# Altium PCB IMA2192_0.9B.PcbDoc
Units mm, origin at the board's own origin, x right, y up, seen from the top; angles counter-clockwise.
Board outline 38.2 x 38.2 mm, 4 copper layers (Top, INT1, GND, Bottom), stack 0.965 mm thick; 63 components, 50 nets, 206 pads, 94 vias.
Unrouted connection lines stored in the file: 29.
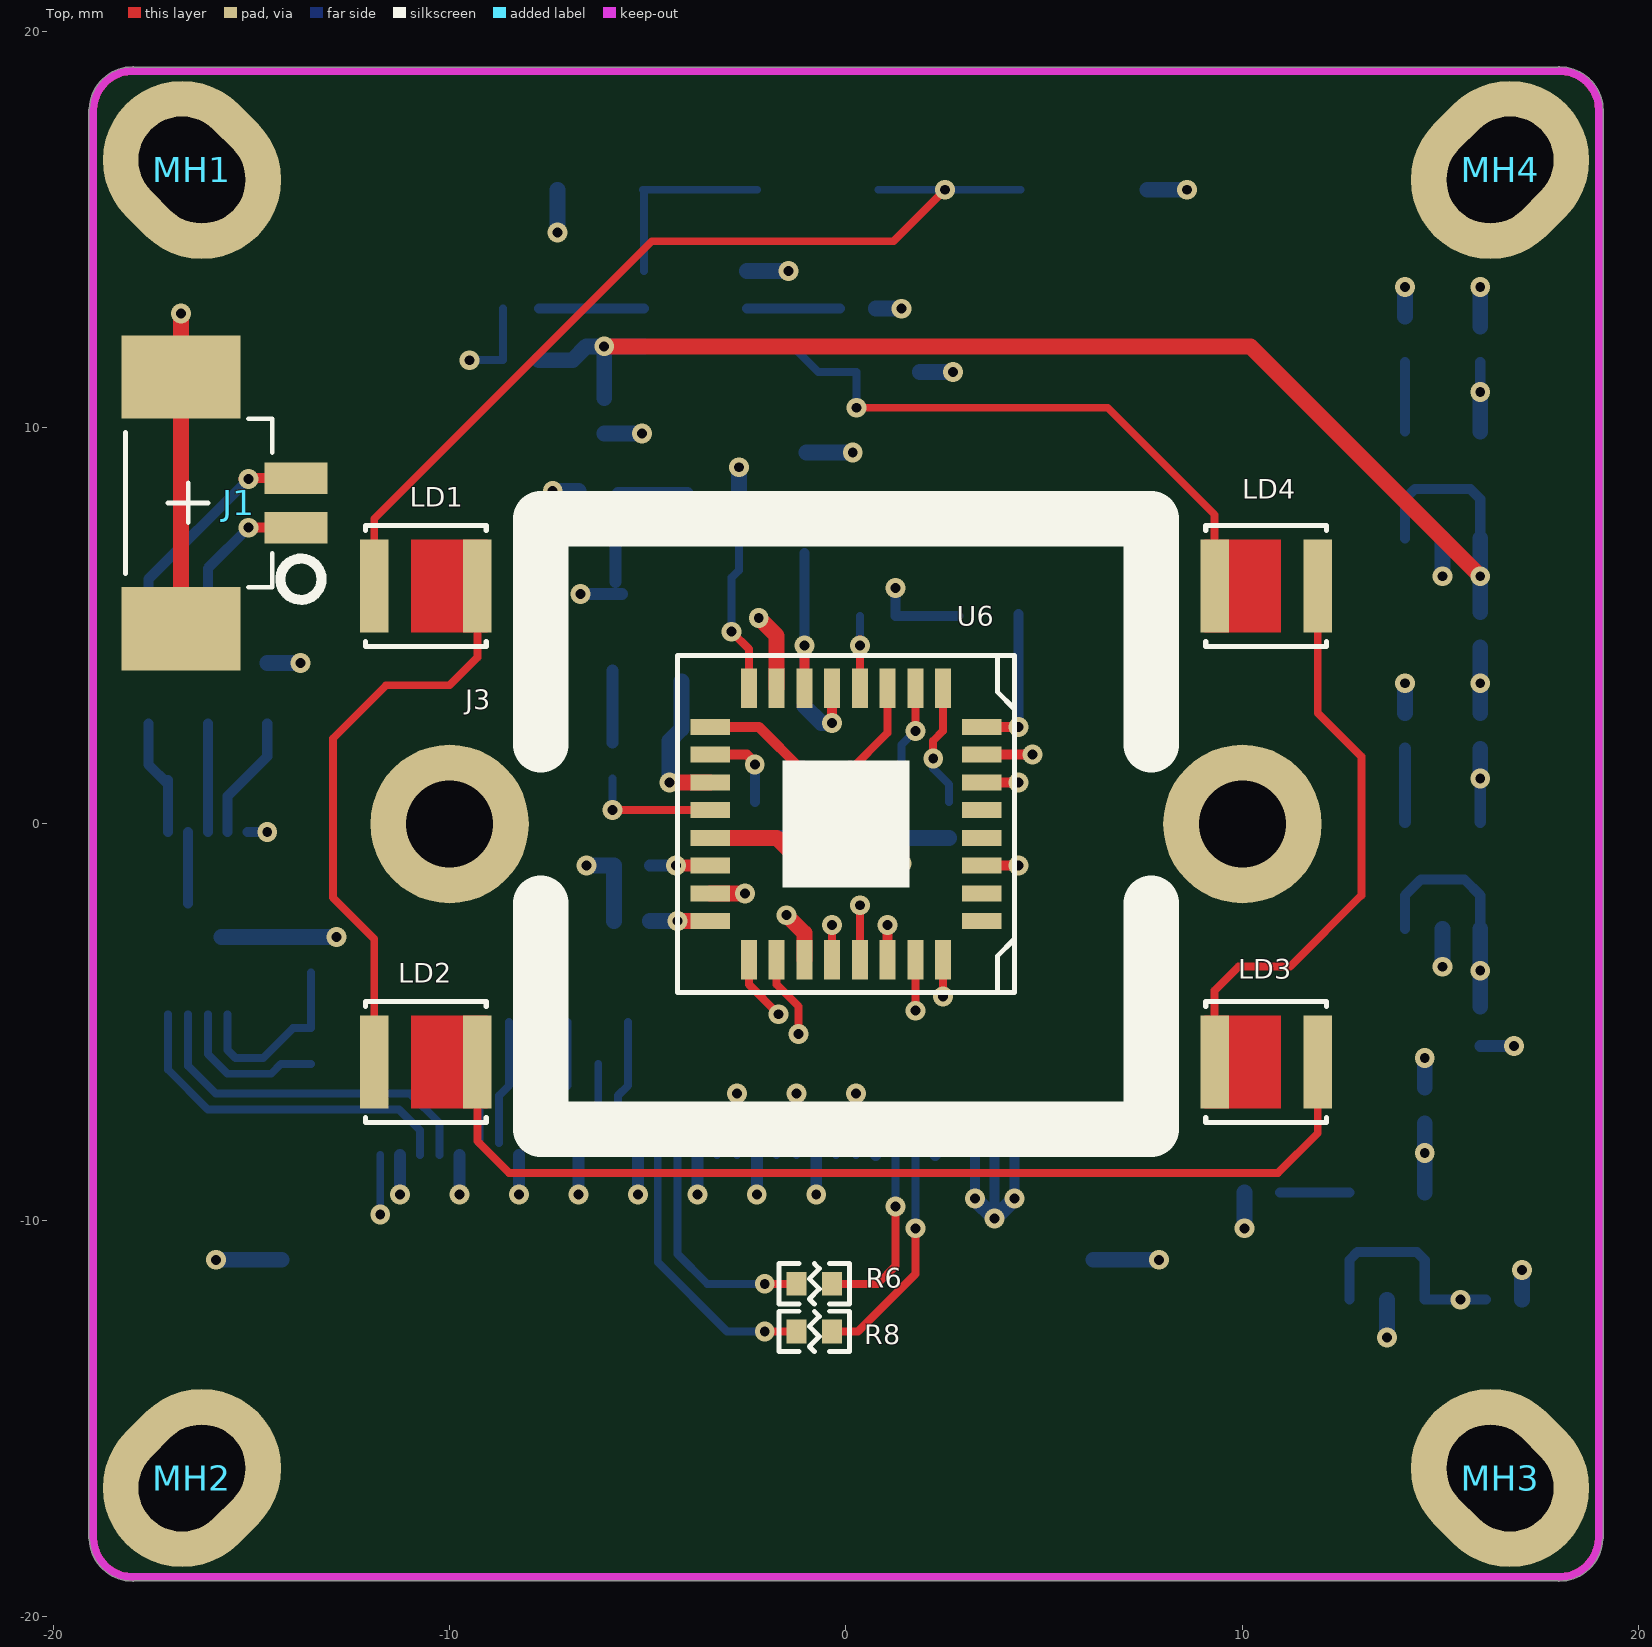
[diagram p0: Top view]
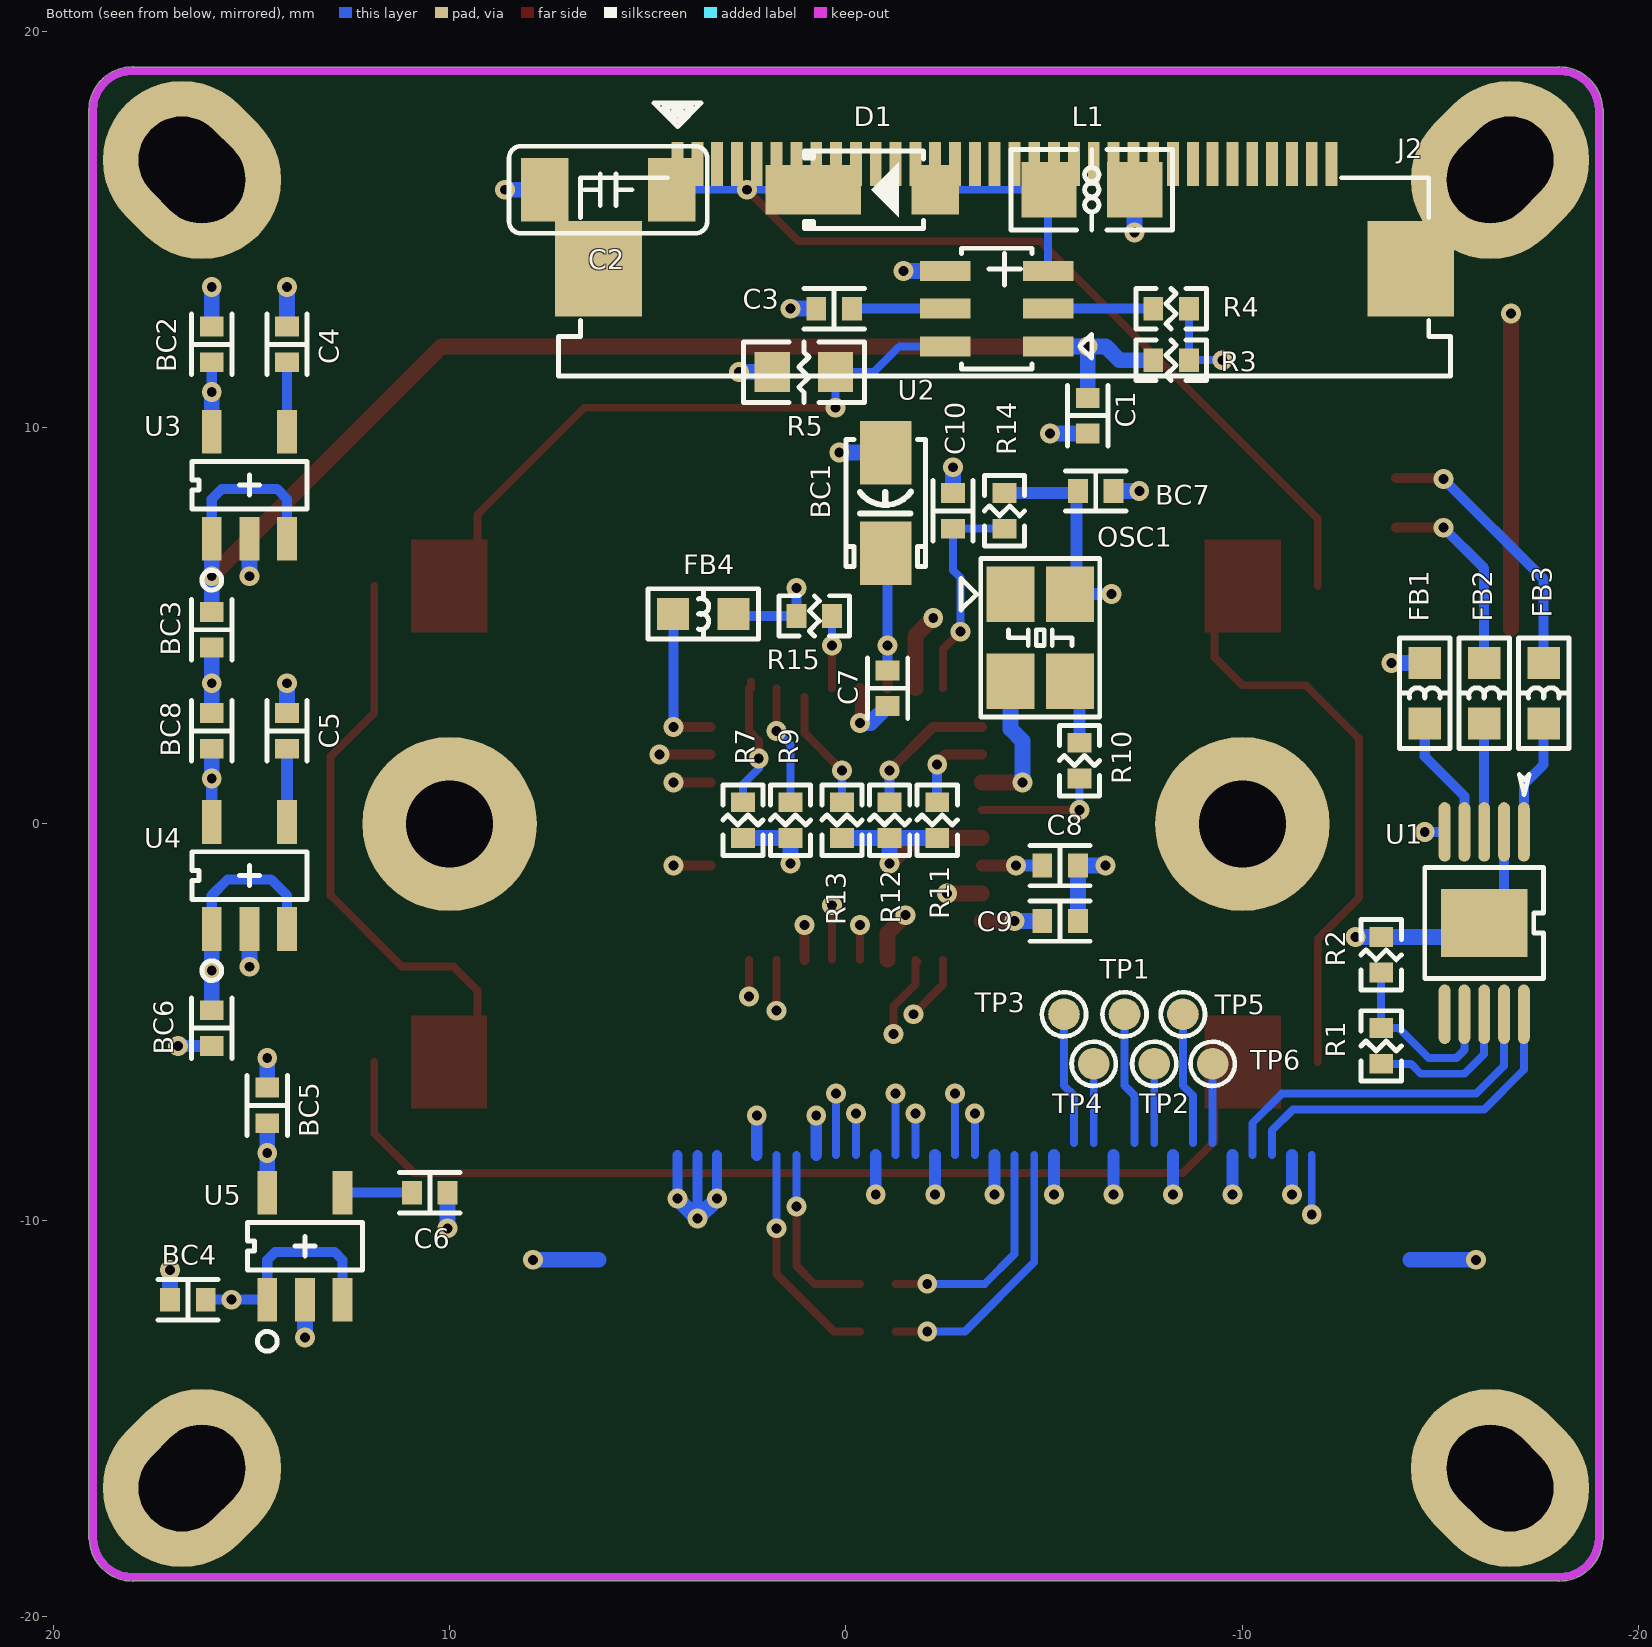
[diagram p1: Bottom view, seen from below]
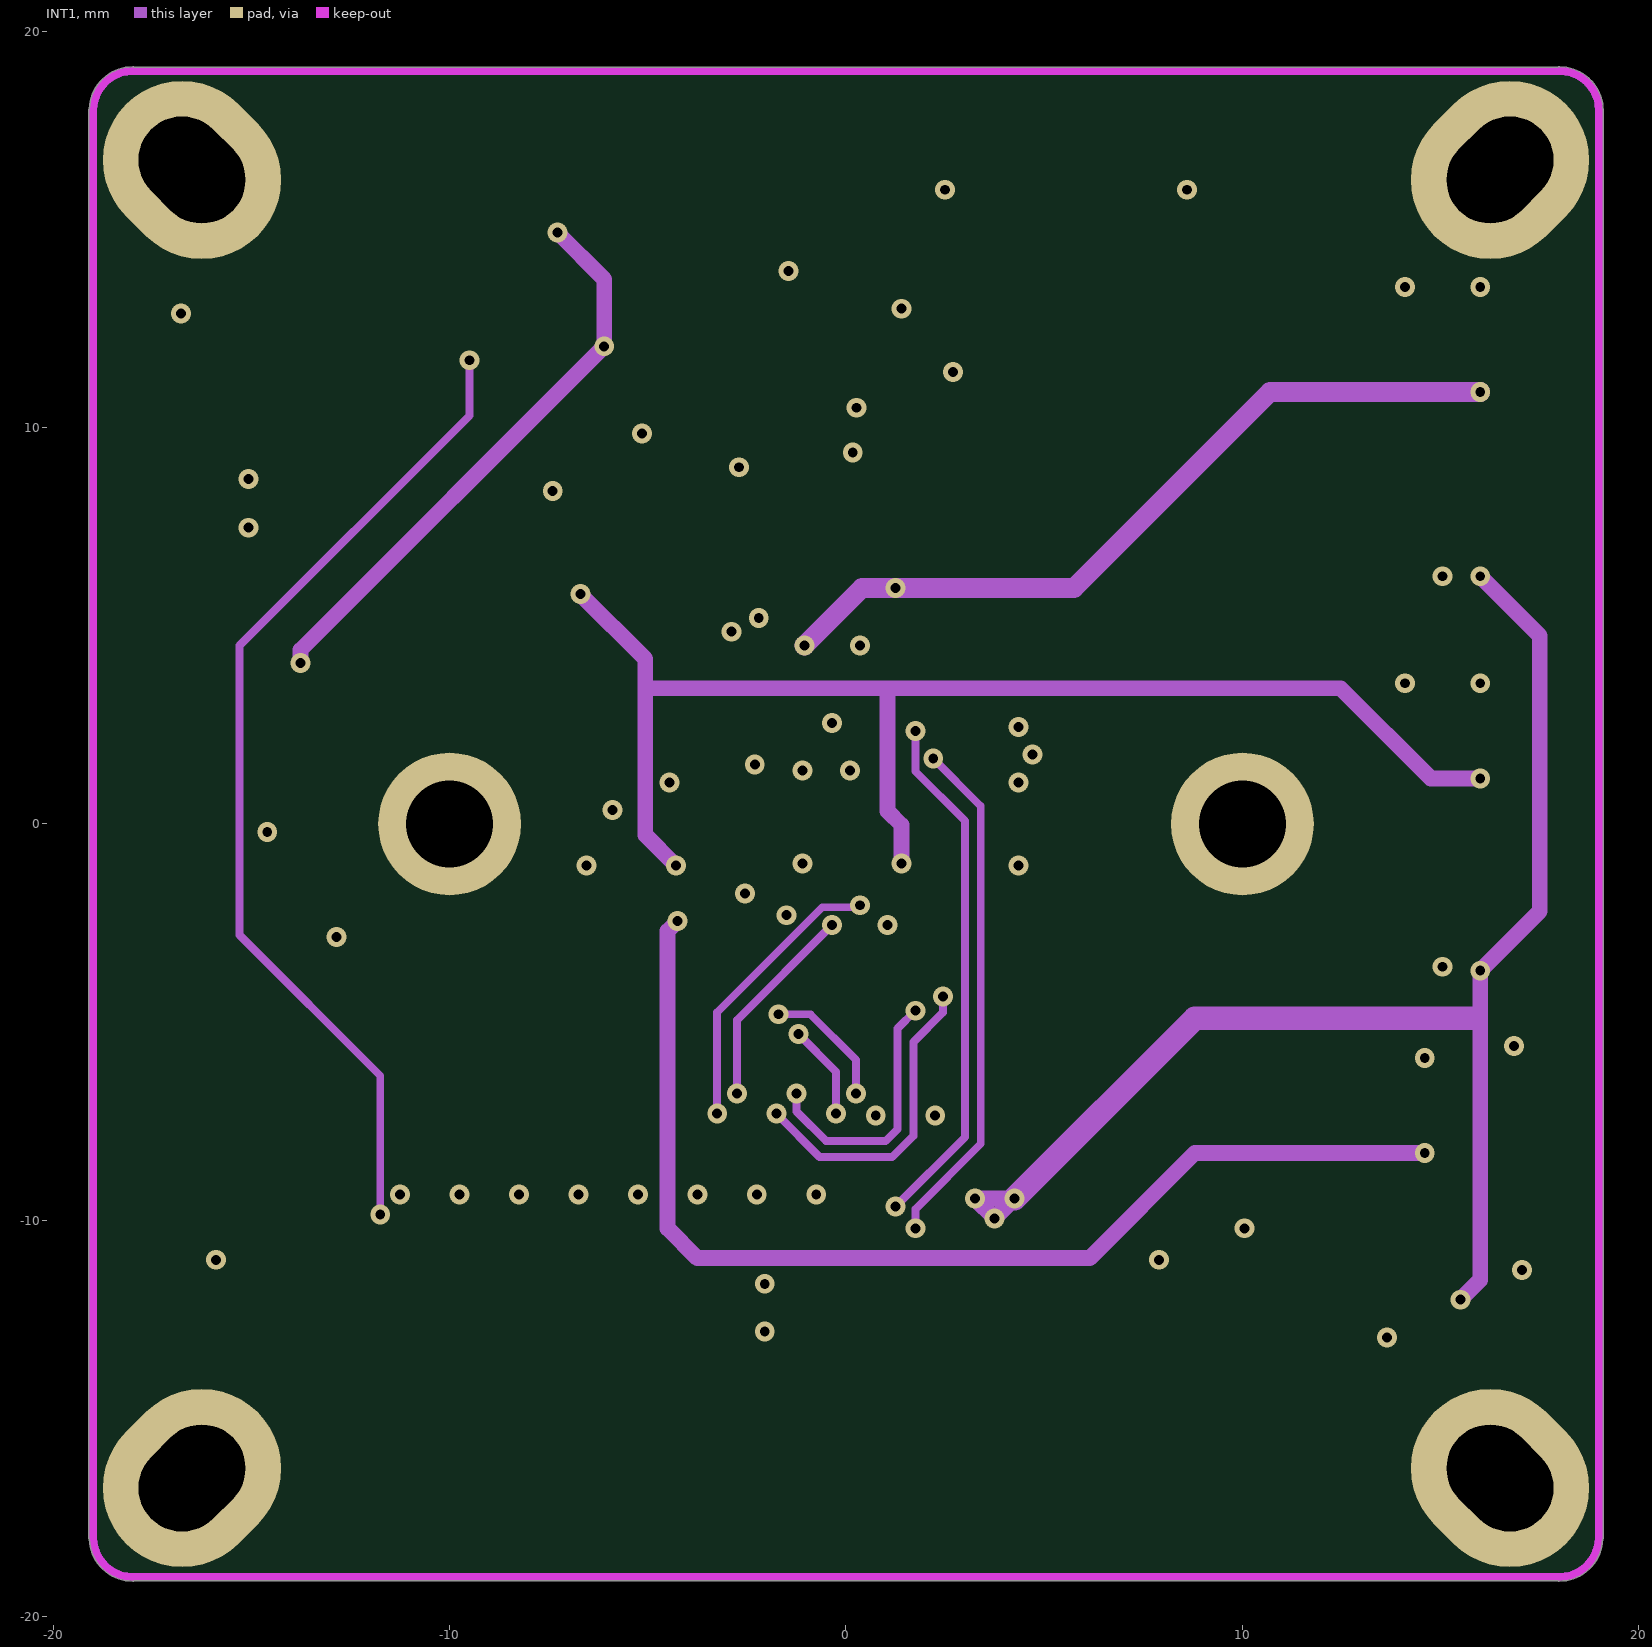
[diagram p2: INT1]
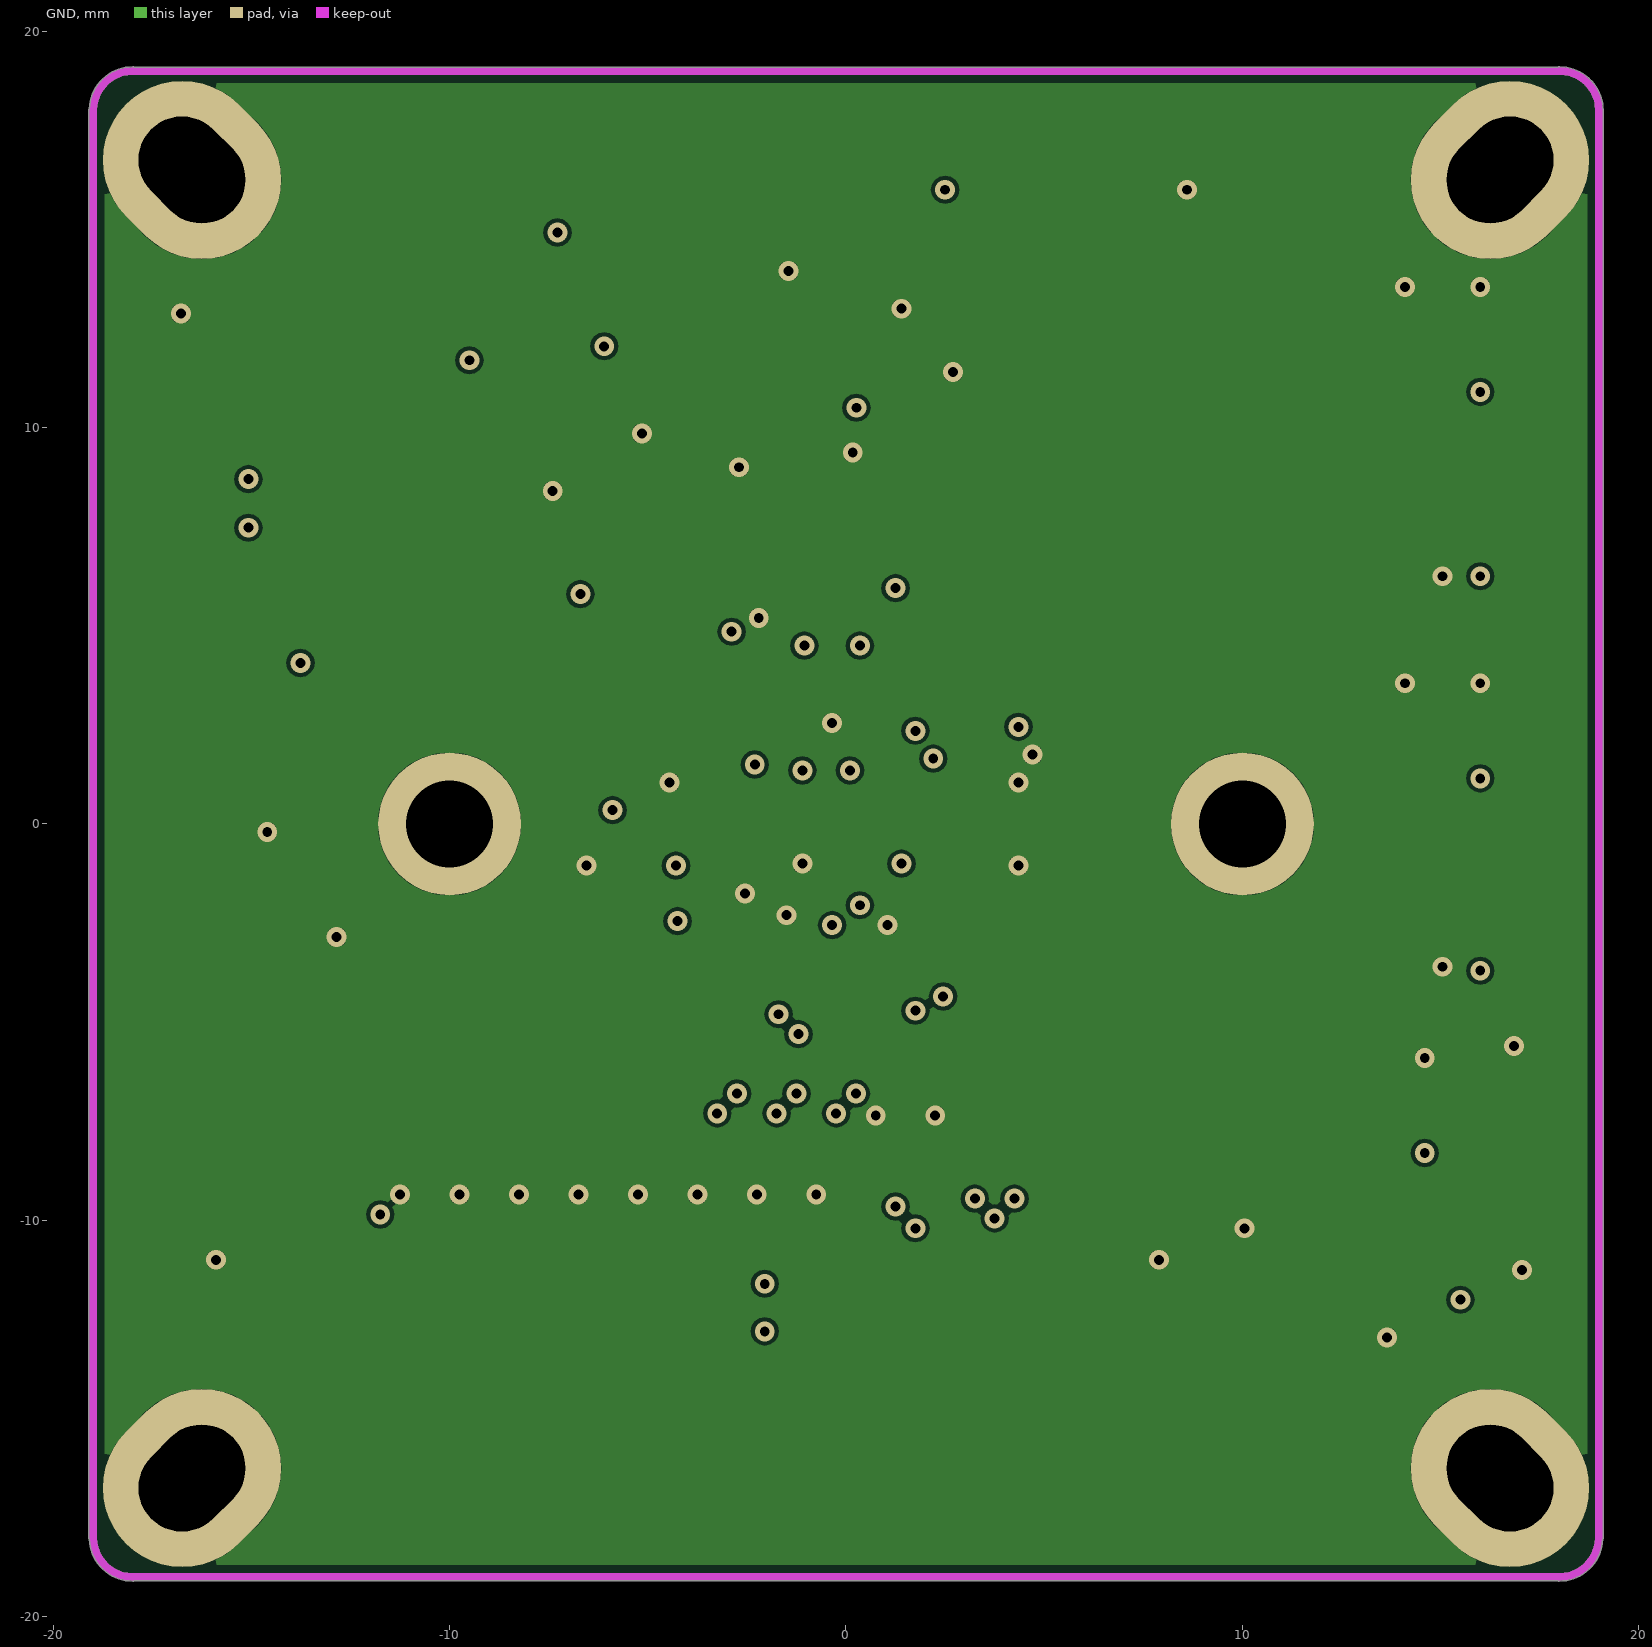
[diagram p3: GND]

## Layer stack, top to bottom
Solder Mask Top: solder mask 0.0102, Solder Resist, Dk 3.5
Top: signal copper 0.0343
Dielectric 1: dielectric 0.254, FR-4, Dk 4.3
INT1: signal copper 0.0343
Dielectric2: dielectric 0.254, FR-4, Dk 4.3
GND: signal copper 0.0343
Dielectric4: dielectric 0.32, FR-4, Dk 4.8
Bottom: signal copper 0.0343
Solder Mask Bottom: solder mask 0.0102, Solder Resist, Dk 3.5

## Board outline
-19.091,-18.043 cw(c-19,-18) -19.1,-18 -19.1,18 cw(c-19,18) -19.091,18.043 cw(c-17.991,18) -17.991,19.1 cw(c-17.991,19) -17.951,19.092 17.959,19.092 cw(c18,19) 18,19.1 cw(c18,18) 19.1,18 19.1,-18 cw(c19,-18) 19.091,-18.043 cw(c17.991,-18) 17.991,-19.1 cw(c17.991,-19) 17.951,-19.092 -17.951,-19.092 cw(c-17.991,-19) -17.991,-19.1 cw(c-17.991,-18)

## Design rules (kind name [scope] priority, off if disabled: settings)
AssemblyTestPointUsage [All] p1 off:
AssemblyTestpoint [All] p1 off: testpointundercomponent=TRUE minsize=1.016 maxsize=2.54 preferedsize=1.524 minholesize=0 maxholesize=1.016 preferedholesize=0.813 testpointgrid=0.025 usegrid=TRUE gridtolerance=0 allowsidetop=TRUE allowsidebottom=TRUE
Clearance Clearance_6 [InNet('+12V') or InNet('N21617464') or InNet('+5.0V')  or InNet('+3.3V') vs IsFill] p1: gap=0.4
Clearance Clearance_4 [InComponent('MH1') OR InComponent('MH2') OR InComponent('MH3') OR InComponent('MH4') or INnet('GND') vs OnLayer('Keep-Out Layer')] p2: gap=0
Clearance Clearance_3 [InComponent('U4') or InComponent('RP1') or InComponent('RP2')] p3: gap=0.127
Clearance Clearance_2 [OnLayer('Keep-Out Layer') vs InNet('GND')] p4: gap=0.1
Clearance Clearance_1 [IsVia] p5: gap=0.1
Clearance [All] p6: gap=0.2
ComponentClearance ComponentClearance_1 [InComponent('J3') vs InComponent('U6') or InComponent('LD1') or InComponent('LD2') or InComponent('LD3') or InComponent('LD4')] p1: gap=-10 collisioncheckmode=3 verticalgap=0.254 showdistances=FALSE
ComponentClearance [All] p2: gap=0.01 collisioncheckmode=3 verticalgap=0 showdistances=FALSE
DiffPairsRouting [All] p1 off: maxlimit=0.254 minlimit=0.2 mostfreqgap=0.254 toplayer_prefgap=0.2 toplayer_minwidth=0.2 toplayer_maxwidth=0.381 toplayer_prefwidth=0.254 midlayer1_mingap=0.254 midlayer1_minwidth=0.381 midlayer1_maxwidth=0.381 midlayer1_prefwidth=0.381 midlayer2_mingap=0.254 midlayer2_minwidth=0.381 midlayer2_maxwidth=0.381 midlayer2_prefwidth=0.381 bottomlayer_prefgap=0.2 bottomlayer_minwidth=0.2 bottomlayer_maxwidth=0.381 bottomlayer_prefwidth=0.254 maxuncoupledlength=12.7
FabricationTestPointUsage [All] p1 off: valid=0 allowmultiple=FALSE
FabricationTestpoint [All] p1 off: side=3 testpointundercomponent=TRUE minsize=1.016 maxsize=2.54 preferedsize=1.524 minholesize=0 maxholesize=1.016 preferedholesize=0.813 testpointgrid=0.025 allowsidetop=TRUE allowsidebottom=TRUE usegrid=TRUE gridtolerance=0
FanoutControl Fanout_BGA [IsBGA] p1 off: bgadir=Out bgaviamode=Centered fanoutstyle=Auto fanoutdirection=Alternating viagrid=0.025 // Fanout_BGA (Default Rule)
FanoutControl Fanout_SOIC [IsSOIC] p3 off: bgadir=Out bgaviamode=Centered fanoutstyle=Auto fanoutdirection=Alternating viagrid=0.025 // Fanout_SOIC (Default Rule)
FanoutControl Fanout_Small [(CompPinCount < 5)] p4 off: bgadir=Out bgaviamode=Centered fanoutstyle=Auto fanoutdirection=OutThenIn viagrid=0.025 // Fanout_Small (Default Rule)
FanoutControl Fanout_Default [All] p5 off: bgadir=Out bgaviamode=Centered fanoutstyle=Auto fanoutdirection=Alternating viagrid=0.025 // Fanout_Default (Default Rule)
Height [All] p1 off: minheight=0 maxheight=25.4 prefheight=12.7
HoleSize [All] p1: absolutevalues=TRUE maxlimit=5 minlimit=0.25 maxpercent=80.000 minpercent=20.000
HoleToHoleClearance [All] p1: gap=0.2 allowstackedmicrovias=TRUE
MinimumSolderMaskSliver [All] p1: minsoldermaskwidth=0
PasteMaskExpansion [All] p1 off: expansion=0
PermittedLayers [All] p1 off: toplayerpermitted=TRUE bottomlayerpermitted=TRUE
PlaneClearance [InNet('GND')] p1 off: clearance=0.508
PlaneConnect [All] p1 off: planeconnectstyle=Direct reliefexpansion=0.508 reliefentries=4 reliefconductorwidth=0.254 reliefairgap=0.254
PolygonConnect [All] p1 off: connectstyle=Direct reliefconductorwidth=0.254 reliefentries=4 polygonreliefangle="90 Angle" airgapwidth=0.1
RoutingVias [All] p1: holewidth=0.25 width=0.5 viastyle="Through Hole" minholewidth=0.25 minwidth=0.5 maxholewidth=0.25 maxwidth=0.5
ShortCircuit [All] p1 off: allowed=FALSE
SilkToSilkClearance [All] p1: silktosilkclearance=0
SilkToSolderMaskClearance [IsPad] p1: minsilkscreentomaskgap=0 clearancetoexposedcopper=TRUE
SolderMaskExpansion [All] p1: expansion=0.102
Width Width_1 [(InNet('VDD_3.3V') OR InNet('AVDD') OR InNet('OVDD') OR InNet('DVDD'))] p1: maxlimit=2 minlimit=0.2 preferedwidth=2
Width [All] p2: maxlimit=1 minlimit=0.1 preferedwidth=0.2
9 further rules are at their usual default settings.

## Components (designator, comment, footprint, x,y, rotation, side; value= is the part's Value field where it differs from the comment)
BC1 "22uF" CTS-3216 -1,8.1 r90 bottom
BC2 "1uF" CS-1005#1 16,12.1 r270 bottom
BC3 "0.1uF" CS-1005#1 16,4.9 r90 bottom
BC4 "0.1uF" CS-1005#1 16.6,-12 r180 bottom
BC5 "1uF" CS-1005#1 14.6,-7.1 r270 bottom
BC6 "0.1uF" CS-1005#1 16,-5.15 r90 bottom
BC7 "1uF" CS-1005#2 -6.3,8.4 r180 bottom
BC8 "1uF" CS-1005#1 16,2.35 r270 bottom
C1 "1uF" CS-1005#1 -6.1,10.3 r270 bottom
C2 "4.7uF-25V-3216" C3216 6,16 r0 bottom
C3 "220nF" CS-1005#1 0.3,13 r180 bottom
C4 "10nF" CS-1005#1 14.1,12.1 r270 bottom
C5 "10nF" CS-1005#1 14.1,2.35 r270 bottom
C6 "10nF" CS-1005#1 10.5,-9.3 r0 bottom
C7 "1uF" CS-1005#1 -1.05,3.425 r90 bottom
C8 "1uF" CS-1005#1 -5.4,-1.05 r0 bottom
C9 "1uF" CS-1005#1 -5.4,-2.45 r0 bottom
C10 "0.1uF" CS-1005#1 -2.7,7.9 r90 bottom
D1 "DFLS140" PowerDI123 -0.4,16 r180 bottom
FB1 "60" LS-1608 -14.6,3.3 r90 bottom
FB2 "60" LS-1608 -16.1,3.3 r90 bottom
FB3 "60" LS-1608 -17.6,3.3 r90 bottom
FB4 "220R//NI" LS-1608 3.6,5.3 r180 bottom
J1 "12505WR-2P" 12505WR-2P -16.6,8.1 r270 top
J2 "05003HR-H34E" 05003HR-H34E -4,14 r0 bottom locked
J3 "Lens Holder" LENS_HOLDER_C_SQUARE 0,0 r180 top locked
L1 "10uH" LS-2012 -6.2,16 r180 bottom
LD1 "LED3030" LED-3030 -10.6,6 r0 top
LD2 "LED3030" LED-3030 -10.6,-6 r0 top
LD3 "LED3030" LED-3030 10.6,-6 r180 top
LD4 "LED3030" LED-3030 10.6,6 r180 top
MH1 "4.04pi" VAEC-2.2#1 -27.3,16.3 r0 top locked
MH2 "4.04pi" VAEC-2.2#2 -16.5,-16.5 r0 top locked
MH3 "4.04pi" VAEC-2.2#3 27.3,-16.3 r0 top locked
MH4 "4.04pi" VAEC-2.2#4 27.3,16.3 r0 top locked
OSC1 "24Mhz-SX32-1.8V" SX-32 -4.9,4.7 r90 bottom
R1 "45.3K" RS-1005 -13.5,-5.6 r270 bottom
R2 "80.6K" RS-1005 -13.5,-3.3 r270 bottom
R3 "10K" RS-1005 -8.2,11.7 r0 bottom
R4 "22" RS-1005 -8.2,13 r180 bottom
R5 "1, 1%" RS-1608 1.062,11.4 r0 bottom
R6 "0" RS-1005 -0.8,-11.6 r180 top
R7 "4.7K" RS-1005 2.6,0.1 r90 bottom
R8 "0" RS-1005 -0.8,-12.8 r180 top
R9 "4.7K" RS-1005 1.4,0.1 r90 bottom
R10 "22" RS-1005 -5.89,1.6 r270 bottom
R11 "10K//NI" RS-1005 -2.3,0.1 r270 bottom
R12 "10K//NI" RS-1005 -1.1,0.1 r270 bottom
R13 "10K//NI" RS-1005 0.1,0.1 r270 bottom
R14 "10K" RS-1005 -4,7.9 r90 bottom
R15 "10K" RS-1005 0.8,5.25 r180 bottom
TP1 "TPS" TP_0.8_SMD -7.027,-4.8 r90 bottom
TP2 "TPS" TP_0.8_SMD -7.776,-6.05 r90 bottom
TP3 "TPS" TP_0.8_SMD -5.5,-4.8 r90 bottom
TP4 "TPS" TP_0.8_SMD -6.25,-6.05 r90 bottom
TP5 "TPS" TP_0.8_SMD -8.5,-4.8 r90 bottom
TP6 "TPS" TP_0.8_SMD -9.25,-6.05 r90 bottom
U1 "DRV8832DGQ" MSOP10-3.0-0.5/PAD -16.1,-2.5 r180 bottom
U2 "TPS61165DBVR" SOT23-6 -3.8,13 r270 bottom
U3 "SGM2036-2.8YN5G/TR" SOT-23-5P 15.05,8.55 r180 bottom
U4 "SGM2036-1.8YN5G/TR" SOT-23-5P 15.05,-1.3 r180 bottom
U5 "SGM2036-1.2YN5G/TR" SOT-23-5P 13.65,-10.65 r180 bottom
U6 "IMX219PLCC32" IMX219-PLCC32 0,0 r90 top locked

## Footprints (in the part's own frame and the unit in brackets; to place one, negate y for a bottom-side part, rotate by r counter-clockwise, add the part's x,y. Pads: shape width x height; smd on the part's side, far side on the other; paste and mask are expansions set on the pad)
05003HR-H34E [mm]
  rect 0.3x1.1 smd: 1(8.25,-2.65) 2(7.75,-2.65) 3(7.25,-2.65) 4(6.75,-2.65) 5(6.25,-2.65) 6(5.75,-2.65) 7(5.25,-2.65) 8(4.75,-2.65) 9(4.25,-2.65) 10(3.75,-2.65) 11(3.25,-2.65) 12(2.75,-2.65) 13(2.25,-2.65) 14(1.75,-2.65) 15(1.25,-2.65) 16(0.75,-2.65) 17(0.25,-2.65) 18(-0.25,-2.65) 19(-0.75,-2.65) 20(-1.25,-2.65) 21(-1.75,-2.65) 22(-2.25,-2.65) 23(-2.75,-2.65) 24(-3.25,-2.65) 25(-3.75,-2.65) 26(-4.25,-2.65) 27(-4.75,-2.65) 28(-5.25,-2.65) 29(-5.75,-2.65) 30(-6.25,-2.65) 31(-6.75,-2.65) 32(-7.25,-2.65) 33(-7.75,-2.65) 34(-8.25,-2.65)
  rect 2.184x2.413 smd: M1(10.244,-0.006) M2(-10.244,-0.006)
  silkscreen extent -11.25,-4.19 11.25,2.7
12505WR-2P [mm]
  rect 0.8x1.6 smd: 1(0.625,2.725) 2(-0.625,2.725)
  rect 2.1x3 smd: 3(-3.175,-0.175) 4(3.175,-0.175)
  silkscreen extent -2.12,-1.58 2.44,3.37
C3216 [mm]
  rect 1.2x1.6 smd: 1(-1.6,0) 2(1.6,0)
  silkscreen extent -2.5,-1.1 2.5,1.1
CS-1005#1 [mm]
  rect 0.5x0.6 smd: 1(-0.45,0) 2(0.45,0)
  silkscreen extent -0.76,-0.51 0.76,0.51
CS-1005#2 [mm]
  rect 0.5x0.6 smd: 1(0.45,0) 2(-0.45,0)
  silkscreen extent -0.76,-0.51 0.76,0.51
CTS-3216 [mil]
  rect 63x51 smd: 1(-50,0) 2(50,0)
  silkscreen extent -63,-39 63,39
IMX219-PLCC32 [mm]
  rect 0.4x1 smd: 1(-0.35,3.425) 2(-1.05,3.425) 3(-1.75,3.425) 4(-2.45,3.425) 13(-2.45,-3.425) 14(-1.75,-3.425) 15(-1.05,-3.425) 16(-0.35,-3.425) 17(0.35,-3.425) 18(1.05,-3.425) 19(1.75,-3.425) 20(2.45,-3.425) 29(2.45,3.425) 30(1.75,3.425) 31(1.05,3.425) 32(0.35,3.425)
  rect 1x0.4 smd: 5(-3.425,2.45) 6(-3.425,1.75) 7(-3.425,1.05) 8(-3.425,0.35) 9(-3.425,-0.35) 10(-3.425,-1.05) 11(-3.425,-1.75) 12(-3.425,-2.45) 21(3.425,-2.45) 22(3.425,-1.75) 23(3.425,-1.05) 24(3.425,-0.35) 25(3.425,0.35) 26(3.425,1.05) 27(3.425,1.75) 28(3.425,2.45)
  Top region: -0.55,1.825 -0.15,1.825 -0.15,2.925 -0.55,2.925
  silkscreen extent -4.25,-4.25 4.25,4.25
LED-3030 [mm]
  rect 0.725x2.35 smd: 1(-1.3,0) 2(1.3,0)
  Top region: -0.375,-1.175 1.55,-1.175 1.55,1.175 -0.375,1.175
  silkscreen extent -1.53,-1.53 1.53,1.53
LENS_HOLDER_C_SQUARE [mm]
  round 4 / inner round 3.6 / far side round 4.4 hole 2.2: 1(-10,0) 2(10,0)
  silkscreen extent -7.7,-7.7 7.7,7.7
LS-1608 [mil]
  rect 32x32 smd: 1(-30,0) 2(30,0)
  silkscreen extent -55,-25 55,25
LS-2012 [mil]
  rect 55x55 smd: 1(-42.5,0) 2(42.5,0)
  silkscreen extent -80,-40 80,40
MSOP10-3.0-0.5/PAD [mm]
  oval 0.3x1.5 smd: 1(1,2.3) 2(0.5,2.3) 3(0,2.3) 4(-0.5,2.3) 5(-1,2.3) 6(-1,-2.3) 7(-0.5,-2.3) 8(0,-2.3) 9(0.5,-2.3) 10(1,-2.3)
  rect 2.18x1.72 smd: 11(0,0)
  silkscreen extent -1.5,-1.4 1.5,3.74
PowerDI123 [mm]
  rect 1.2x1.25 smd: 1(1.85,0)
  rect 2.4x1.25 smd: 2(-1.225,0)
  silkscreen extent -1.45,-0.97 1.55,0.98
RS-1005 [mm]
  rect 0.5x0.6 smd: 1(-0.45,0) 2(0.45,0)
  silkscreen extent -0.89,-0.51 0.89,0.51
RS-1608 [mil]
  rect 35x40 smd: 1(-31.5,0) 2(31.5,0)
  silkscreen extent -60,-30 60,30
SOT23-6 [mm]
  rect 0.508x1.27 smd: 1(0.95,1.3) 2(0,1.3) 3(-0.95,1.3) 4(-0.95,-1.3) 5(0,-1.3) 6(0.95,-1.3)
  silkscreen extent -1.52,-0.89 1.52,2.4
SOT-23-5P [mm]
  rect 0.5x1.1 smd: 1(-0.95,-1.35) 2(0,-1.35) 3(0.95,-1.35) 4(0.95,1.35) 5(-0.95,1.35)
  silkscreen extent -1.45,-2.65 1.45,0.6
SX-32 [mm]
  rect 1.4x1.2 smd: 1(1.1,0.75) 2(-1.1,0.75) 3(-1.1,-0.75) 4(1.1,-0.75)
  silkscreen extent -2,-1.5 2,2
TP_0.8_SMD [mm]
  round 0.8 smd: 1(0,0)
  silkscreen extent -0.56,-0.56 0.56,0.56
VAEC-2.2#1 [mm]
  rrect100% 4.7x4 hole 2.2 slot 2.9 at 135 deg rot 135: 1(10.8,0.2)
VAEC-2.2#2 [mm]
  rrect100% 4.7x4 hole 2.2 slot 2.9 at 45 deg rot 45: 1(0,0)
VAEC-2.2#3 [mm]
  rrect100% 4.7x4 hole 2.2 slot 2.9 at 135 deg rot 135: 1(-10.8,-0.2)
VAEC-2.2#4 [mm]
  rrect100% 4.7x4 hole 2.2 slot 2.9 at 45 deg rot 45: 1(-10.8,0.2)

## Via types
v1: diameter 0.5, hole 0.25, Top to Bottom, 94 vias

## Nets (pads, with @x,y where several pads share a name; then routed paths per layer and width w, separated by ;. In a path a pad name is that pad's centre, name@x,y a point inside that pad or via, vN(x,y) a via of type N, cw(c..) or ccw(c..) an arc to the next point about the centre after c; other vN are vias at no path point)
1V2: BC5.2 C9.2 U5.5 U6.4 | length 31.6
  Top w0.4: v1(-4.25,-2.45) U6.4
  INT1 w0.4: v1(-4.25,-2.45) -4.5,-2.7 -4.5,-10.2 -3.749,-10.951 6.149,-10.951 8.8,-8.3 v1(14.6,-8.3)
  Bottom w0.4: C9.2 v1(-4.25,-2.45) ; U5.5 v1(14.6,-8.3) BC5.2
1V8: BC7.2 BC8.2 C8.2 OSC1.4 R7.1 R9.1 R14.2 U4.5 U6.2 | length 44.6
  Top w0.3: v1(-4.289,-1.05) U6.2
  INT1 w0.4: v1(-6.7,5.8) -5.066,4.166 -5.066,3.4 ; v1(-4.289,-1.05) -5.066,-0.273 -5.066,3.4 ; v1(1.4,-1) 1.4,-0.027 1.05,0.323 1.05,3.425 ; v1(16,1.15) 14.75,1.15 12.475,3.425 1.05,3.425 ; -5.066,3.4 -5.041,3.425 1.05,3.425
  Bottom w0.3: v1(-6.7,5.8) OSC1.4 ; OSC1.4@-5.816,6.1 BC7.2@-5.816,8.266 ; BC7.2@-5.75,8.35 R14.2 ; C8.2 v1(-4.289,-1.05) ; U4.5 v1(16,1.15)
  Bottom w0.4: v1(1.4,-1) R9.1 R7.1 ; v1(16,1.15) BC8.2
2V8: BC1.1 BC2.2 C7.2 FB4.2 R15.1 U3.5 U6.26 | length 27.8
  Top w0.254: U6.26 v1(-1.05,4.5)
  INT1 w0.5: v1(-1.05,4.5) 0.4,5.95 v1(1.25,5.95) 5.75,5.95 10.7,10.9 v1(16,10.9)
  Bottom w0.254: C7.2 v1(-1.05,4.5) BC1.1@-1.05,6.83 ; v1(1.25,5.95) R15.1 FB4.2@2.838,5.25 ; v1(16,10.9) BC2.2
  Bottom w0.4: U3.5 v1(16,10.9)
+3.3V: BC3.2 BC4.2 BC6.2 C1.1 FB1.2 J2.1 J2.2 J2.3 L1.2 R3.2 U2.1 U3.1 U3.3 U4.1 U4.3 U5.1 U5.3 | length 103.4
  Top w0.4: v1(-6.1,12.05) 10.2,12.05 v1(16,6.25)
  INT1 w0.4: v1(-13.762,4.062) -13.762,4.388 v1(-6.1,12.05) -6.1,13.741 v1(-7.28,14.921) ; v1(4.25,-9.45) v1(3.25,-9.45) v1(3.75,-9.95) v1(4.25,-9.45) ; v1(15.5,-12) 16,-11.5 v1(16,-3.7) 17.5,-2.2 17.5,4.75 v1(16,6.25)
  INT1 w0.6: v1(4.25,-9.45) 8.8,-4.9 15.9,-4.9
  Bottom w0.254: v1(3.25,-9.45) 3.25,-8.35 ; v1(3.75,-9.95) 3.75,-8.35 ; v1(4.25,-9.45) 4.25,-8.35 ; U5.3 12.7,-11 12.9,-10.8 14.4,-10.8 14.6,-11 U5.1 v1(15.5,-12) BC4.2 ; U4.3 14.1,-1.8 14.5,-1.4 15.6,-1.4 16,-1.8 U4.1 ; U3.3 14.1,8.2 14.35,8.45 15.75,8.45 16,8.2 U3.1
  Bottom w0.4: FB1.2 v1(-13.762,4.062) ; R3.2 -6.9,11.7 -6.55,12.05 v1(-6.1,12.05) ; v1(-7.28,14.921) L1.2 ; C1.1 v1(-6.1,12.05) ; U2.1 v1(-6.1,12.05) ; v1(3.25,-9.45) v1(3.75,-9.95) v1(4.25,-9.45) ; BC6.2@16,-4.6 v1(16,-3.7) U4.1 ; BC3.2 v1(16,6.25) U3.1
DRIVE_WS2812_3V3: J2.33 R3.1 R4.2 | length 29.1
  INT1 w0.2: v1(-11.75,-9.85) -11.75,-6.35 -15.3,-2.8 -15.3,4.5 -9.5,10.3 v1(-9.5,11.7)
  Bottom w0.2: v1(-11.75,-9.85) -11.75,-8.35 ; v1(-9.5,11.7) R3.1 R4.2
DVP_D0: J2.18 R6.2 | length 5.8
  Top w0.2: v1(-2.05,-11.6) R6.2
  Bottom w0.2: -4.25,-8.35 -4.25,-10.85 -3.5,-11.6 v1(-2.05,-11.6)
DVP_D1: J2.19 R8.2 | length 7
  Top w0.2: v1(-2.05,-12.8) R8.2
  Bottom w0.2: -4.75,-8.35 -4.75,-11.05 -3,-12.8 v1(-2.05,-12.8) ; v1@-2.05,-12.77 v1@-2.012,-12.77
GND: BC1.2 BC2.1 BC3.1 BC4.1 BC5.1 BC6.1 BC7.1 BC8.1 C1.2 C2.2 C3.1 C4.1 C5.1 C6.1 C7.1 C8.1 C9.1 C10.2 J1.3 J1.4 J2.5 J2.8 J2.11 J2.14 J2.17 J2.20 J2.23 J2.26 J2.29 J2.32 J2.M1 J2.M2 J3.1 J3.2 MH1.1 MH2.1 MH3.1 MH4.1 OSC1.2 R2.1 R5.2 R11.2 R12.2 R13.2 U1.2 U1.5 U1.11 U2.4 U3.2 U4.2 U5.2 U6.1 U6.3 U6.7 U6.10 U6.15 U6.18 U6.19 U6.25 U6.27 U6.31 | length 65
  Top w0.254: v1(-0.35,2.55) U6.25 ; U6.10 v1(1.05,-2.55) ; U6.15 v1(4.35,-1.05) ; U6.18 v1(4.35,1.05) ; U6.19 v1(4.707,1.75)
  Top w0.4: J1.4 J1.3 v1(-16.775,12.875) ; v1(-4.45,1.05) U6.31 ; U6.3 v1(-2.55,-1.75) ; U6.1 -1.75,-0.35 v1(-1.1,-1) ; v1(-2.2,5.2) -1.75,4.75 U6.27 ; v1(-1.5,-2.3) -1.05,-2.75 U6.7
  Bottom w0.254: U1.11@-16.6,-2 U1.2 ; U1.5 v1(-14.6,-0.2)
  Bottom w0.3: v1(-11.25,-9.35) -11.25,-8.35 ; v1(-9.75,-9.35) -9.75,-8.35 ; v1(-8.25,-9.35) -8.25,-8.35 ; v1(-6.75,-9.35) -6.75,-8.35 ; v1(-5.25,-9.35) -5.25,-8.35 ; v1(-3.75,-9.35) -3.75,-8.35 ; v1(-2.25,-9.35) -2.25,-8.35 ; v1(-0.75,-9.35) -0.75,-8.35 ; 0.75,-8.35 v1(0.75,-7.351) ; 2.25,-8.35 v1(2.25,-7.351) ; BC6.1 v1(16.85,-5.6)
  Bottom w0.4: v1(-15.894,-10.994) -14.244,-10.994 ; U1.11@-15.75,-2.85 R2.1 v1(-12.85,-2.85) ; v1(-7.4,8.4) BC7.1 ; v1(-6.55,-1.05) C8.1 C9.1 ; C1.2 v1(-5.15,9.85) ; v1(-4.45,1.05) -4.45,2.1 -4.15,2.4 OSC1.2 ; C10.2 v1(-2.7,9) ; U2.4 v1(-1.45,13.95) ; R11.2 R12.2 ; v1(-1.1,-1) R12.2 ; C7.1 -0.625,2.55 v1(-0.35,2.55) ; BC1.2 v1(0.17,9.37) ; R13.2 R12.2 ; C3.1 v1(1.4,13) ; R5.2 v1(2.7,11.4) ; 6.244,-10.994 v1(7.894,-10.994) ; C2.2 v1(8.6,16) ; v1(10.05,-10.2) C6.1 ; v1(13.65,-12.95) U5.2 ; C5.1 v1(14.1,3.55) ; 14.1,12.8 v1(14.1,13.55) ; BC5.1 v1(14.6,-5.9) ; v1(15.05,-3.6) U4.2 ; v1(15.05,6.25) U3.2 ; BC8.1 v1(16,3.55) BC3.1 ; BC2.1 v1(16,13.55) ; BC4.1 v1(17.05,-11.25)
IR_ANODE: C2.1 D1.2 LD1.1 | length 23.1
  Top w0.2: LD1.1 -11.9,7.7 -4.9,14.7 1.2,14.7 v1(2.5,16)
  Bottom w0.2: D1.2 v1(2.5,16) C2.1
IR_CATHODE: LD4.2 R5.1 U2.6 | length 15.9
  Top w0.2: v1(0.262,10.5) 6.6,10.5 9.3,7.8 LD4.2
  Bottom w0.2: U2.6 -1.35,12.05 -0.7,11.4 R5.1 v1(0.262,10.5)
MCLK: R10.2 U6.32 | length 3.3
  Top w0.2: v1(-5.89,0.35) U6.32
  Bottom w0.2: v1(-5.89,0.35) R10.2
MIPI_CSI_CLK0_DN: J2.12 U6.11 | length 9.4
  Top w0.2: v1(1.75,-4.71) U6.11
  INT1 w0.2: v1(-1.25,-6.8) -1.25,-7.25 -0.5,-8 1,-8 1.3,-7.7 1.3,-5.16 v1(1.75,-4.71)
  Bottom w0.2: -1.25,-8.35 v1(-1.25,-6.8)
MIPI_CSI_CLK0_DP: J2.13 U6.12 | length 9.9
  Top w0.2: v1(2.45,-4.35) U6.12
  INT1 w0.2: v1(-1.75,-7.301) -1.75,-7.316 -0.666,-8.4 1.166,-8.4 1.7,-7.866 1.7,-5.5 2.45,-4.75 v1(2.45,-4.35)
  Bottom w0.2: -1.75,-8.35 v1(-1.75,-7.301)
MIPI_CSI_CLK1_DN: J2.24 TP1.1 | length 3.2
  Bottom w0.2: -7.276,-8.05 -7.276,-6.85 -7.027,-6.6 TP1.1@-7.027,-5
MIPI_CSI_CLK1_DP: J2.25 TP2.1 | length 2
  Bottom w0.2: -7.776,-8.05 TP2.1
MIPI_CSI_D0_N: J2.9 U6.5 | length 6.5
  Top w0.2: U6.5 -2.45,-4.05 v1(-1.7,-4.8)
  INT1 w0.2: v1(-1.7,-4.8) -0.9,-4.8 0.25,-5.95 v1(0.25,-6.8)
  Bottom w0.2: 0.25,-8.35 v1(0.25,-6.8)
MIPI_CSI_D0_P: J2.10 U6.6 | length 5.8
  Top w0.2: U6.6@-1.8,-3.475 U6.6 -1.75,-4.05 -1.2,-4.6 v1(-1.2,-5.3)
  INT1 w0.2: v1@-1.3,-5.2 v1(-1.2,-5.3) -0.25,-6.25 v1(-0.25,-7.301)
  Bottom w0.2: -0.25,-8.35 v1(-0.25,-7.301)
MIPI_CSI_D1_N: J2.15 U6.8 | length 7.7
  Top w0.2: U6.8 v1(-0.35,-2.55)
  INT1 w0.2: v1(-2.75,-6.8) -2.75,-4.95 v1(-0.35,-2.55)
  Bottom w0.2: -2.75,-8.35 v1(-2.75,-6.8)
MIPI_CSI_D1_P: J2.16 U6.9 | length 9.7
  Top w0.2: U6.9 v1(0.35,-2.05)
  INT1 w0.2: v1(-3.25,-7.301) -3.25,-4.75 -0.6,-2.1 0.3,-2.1 v1(0.35,-2.05)
  Bottom w0.2: -3.25,-8.35 v1(-3.25,-7.301)
MIPI_CSI_D2_N: J2.21 TP3.1 | length 3.2
  Bottom w0.2: -5.75,-8.05 -5.75,-6.85 -5.5,-6.6 TP3.1@-5.5,-5
MIPI_CSI_D2_P: J2.22 TP4.1 | length 2
  Bottom w0.2: -6.25,-8.05 TP4.1
MIPI_CSI_D3_N: J2.27 TP5.1 | length 3.2
  Bottom w0.2: -8.75,-8.05 -8.75,-6.85 -8.5,-6.6 TP5.1@-8.5,-5
MIPI_CSI_D3_P: J2.28 TP6.1 | length 2
  Bottom w0.2: -9.25,-8.05 TP6.1
MIPI_CSI_I2C_SCL: J2.7 R6.1 R9.2 U6.22 | length 20.8
  Top w0.2: R6.1 0.8,-11.6 1.25,-11.15 v1(1.25,-9.651) ; v1(1.75,2.35) U6.22
  INT1 w0.2: v1(1.25,-9.651) 3,-7.901 3,0.081 1.75,1.331 v1(1.75,2.35)
  Bottom w0.2: v1(1.25,-9.651) 1.25,-8.35 ; R9.2 1.4,2 v1(1.75,2.35)
MIPI_CSI_I2C_SDA: J2.6 R7.2 R8.1 U6.21 | length 22.1
  Top w0.2: R8.1 0.3,-12.8 1.75,-11.35 v1(1.75,-10.2) ; v1(2.2,1.65) 2.2,2.1 2.45,2.35 U6.21 ; U6.21@2.4,3.425 U6.21@2.4,3.6
  INT1 w0.2: v1(1.75,-10.2) 1.75,-9.716 3.4,-8.067 3.4,0.45 v1(2.2,1.65)
  Bottom w0.2: v1(1.75,-10.2) 1.75,-8.35 ; v1(2.2,1.65) 2.2,1.4 2.6,1 R7.2
MRST: C10.1 R14.1 U6.28 | length 5.6
  Top w0.2: v1(-2.886,4.852) -2.45,4.416 U6.28
  Bottom w0.2: R14.1 C10.1 -2.7,6.4 -2.886,6.214 v1(-2.886,4.852)
N21776461: OSC1.3 R10.1 | length 1.8
  Bottom w0.3: R10.1 OSC1.3@-5.89,3.875
N21846940: FB4.1 U6.20 | length 3.8
  Top w0.254: U6.20 v1(4.35,2.45)
  Bottom w0.254: v1(4.35,2.45) FB4.1@4.35,5.3
N21847187: R15.2 U6.24 | length 2
  Top w0.2: U6.24 v1(0.35,4.5) v1@0.35,4.653
  Bottom w0.2: v1(0.35,4.5) R15.2
N21847468: R11.1 U6.30 | length 2.2
  Top w0.254: U6.30 -2.5,1.75 -2.3,1.55 v1(-2.3,1.5)
  Bottom w0.254: R11.1 v1(-2.3,1.5)
N21847471: R12.1 U6.29 | length 3.6
  Top w0.254: U6.29 -2.2,2.45 v1(-1.1,1.35) ; v1@-1.075,1.375 v1@-1.05,1.35
  Bottom w0.254: R12.1 v1(-1.1,1.35)
N21847474: R13.1 U6.23 | length 3
  Top w0.2: v1(0.1,1.35) 1.05,2.3 U6.23@1.05,3.2
  Bottom w0.2: R13.1 v1(0.1,1.35)
N21856873: FB1.1 U1.4 | length 3.2
  Bottom w0.254: U1.4 -15.6,0.7 -14.6,1.7 FB1.1
N21856915: FB2.1 U1.3 | length 2.7
  Bottom w0.254: U1.3 FB2.1
N21856926: FB2.2 J1.1 | length 5
  Top w0.254: v1(-15.075,7.475) J1.1
  Bottom w0.254: FB2.2 -16.1,6.45 v1(-15.075,7.475)
N21856928: FB3.1 U1.1 | length 3.1
  Bottom w0.254: FB3.1 -17.6,1.5 -17.1,1 ; U1.1 -17.1,1 ; -17.1,1.11 -17.1,1
N21856930: FB3.2 J1.2 | length 7
  Top w0.254: v1@-15.2,8.7 -15.175,8.725 J1.2
  Bottom w0.254: FB3.2 -17.6,6.175 v1(-15.075,8.7)
N21856958: R1.1 R2.2 U1.7 | length 4.8
  Bottom w0.2: U1.7 -15.6,-5.7 -15.4,-5.9 -14.7,-5.9 -13.95,-5.15 R1.1 R2.2
N21856962: R1.2 U1.8 | length 3.9
  Bottom w0.2: U1.8 -16.1,-5.8 -15.6,-6.3 -14.5,-6.3 -14.25,-6.05 R1.2
N21857843: C4.2 U3.4 | length 1.8
  Bottom w0.254: U3.4 C4.2
N21857976: C6.2 U5.4 | length 1.8
  Bottom w0.254: C6.2 U5.4
N21858696: LD1.2 LD2.1 | length 14.9
  Top w0.2: LD2.1 -11.9,-2.9 -12.947,-1.853 -12.947,2.153 -11.6,3.5 -10,3.5 -9.3,4.2 LD1.2
N21858698: LD2.2 LD3.1 | length 25.7
  Top w0.2: LD2.2 -9.3,-8 -8.5,-8.8 10.9,-8.8 11.9,-7.8 LD3.1
N21858700: LD3.2 LD4.1 | length 14.7
  Top w0.2: LD3.2 9.3,-4.2 9.9,-3.6 11.2,-3.6 13,-1.8 13,1.7 11.9,2.8 LD4.1
N21858768: D1.1 L1.1 U2.3 | length 4.9
  Bottom w0.2: L1.1 D1.1 ; U2.3 L1.1@-5.1,15.979
N21858830: R4.1 U2.2 | length 2.6
  Bottom w0.254: R4.1 U2.2
N21858841: C3.2 U2.5 | length 2.4
  Bottom w0.254: U2.5 C3.2
N21860037: C5.2 U4.4 | length 1.9
  Bottom w0.3: U4.4 C5.2
TDN_OUT1: J2.30 U1.9 | length 9.1
  Bottom w0.2: U1.9 -16.6,-6.1 -15.9,-6.8 -11,-6.8 -10.25,-7.55 -10.25,-8.35
TDN_OUT2: J2.31 U1.10 | length 9
  Bottom w0.2: U1.10 -17.1,-6.2 -16.1,-7.2 -11.276,-7.2 -10.75,-7.726 -10.75,-8.35
pads on no net: J2.4 J2.34 OSC1.1 U1.6 U6.13 U6.14 U6.16 U6.17

## Polygon pours and split planes (outlines as drawn)
GND on GND "GND" (solid, remove dead copper, pour order 12): -21,23.542 -21,-19.9 22.6,-19.9 22.6,24.591

## Keep-outs
Keep-Out Layer:
  lines w0.2: -19,-18 -19,18 ; -18.991,-18 ccw(c-17.991,-18) -17.991,-19 ; -18.991,18 cw(c-17.991,18) -17.991,19 ; -17.991,-18.991 17.991,-18.991 ; -17.991,18.991 18.1,18.991 ; 17.991,-19 ccw(c17.991,-18) 18.991,-18 ; 18,19 cw(c18,18) 19,18 19,-18

## Other copper
Top:
  region: 30.085,4.35
Bottom:
  region: -298.997,-274.998
Multi-Layer:
  lines w0.2: -19,-18 -19,18 ; -18.991,-18 ccw(c-17.991,-18) -17.991,-19 ; -18.991,18 cw(c-17.991,18) -17.991,19 ; -17.991,-18.991 17.991,-18.991 ; -17.991,18.991 18,18.991 ; 17.991,-19 ccw(c17.991,-18) 18.991,-18 ; 18,19 cw(c18,18) 19,18 19,-18

## Silkscreen, mask and mechanical layers (free items; w line width, h text height)
Outline:
  lines w0.2: -19,-18 -19,18 ; -18.991,-18 ccw(c-17.991,-18) -17.991,-19 ; -18.991,18 cw(c-17.991,18) -17.991,19 ; -17.991,-18.991 17.991,-18.991 ; -17.991,18.991 18,18.991 ; 17.991,-19 ccw(c17.991,-18) 18.991,-18 ; 18,19 cw(c18,18) 19,18 19,-18